# Altium PCB Wings_SMD_Breakout_v1.1.PcbDoc (part 2 of 2)
Units mm, origin at the board's own origin, x right, y up, seen from the top; angles counter-clockwise.
Board outline 50.8 x 30 mm, 2 copper layers (Top Layer, Bottom Layer), stack 1.569 mm thick; 52 components, 60 nets, 219 pads, 125 vias.
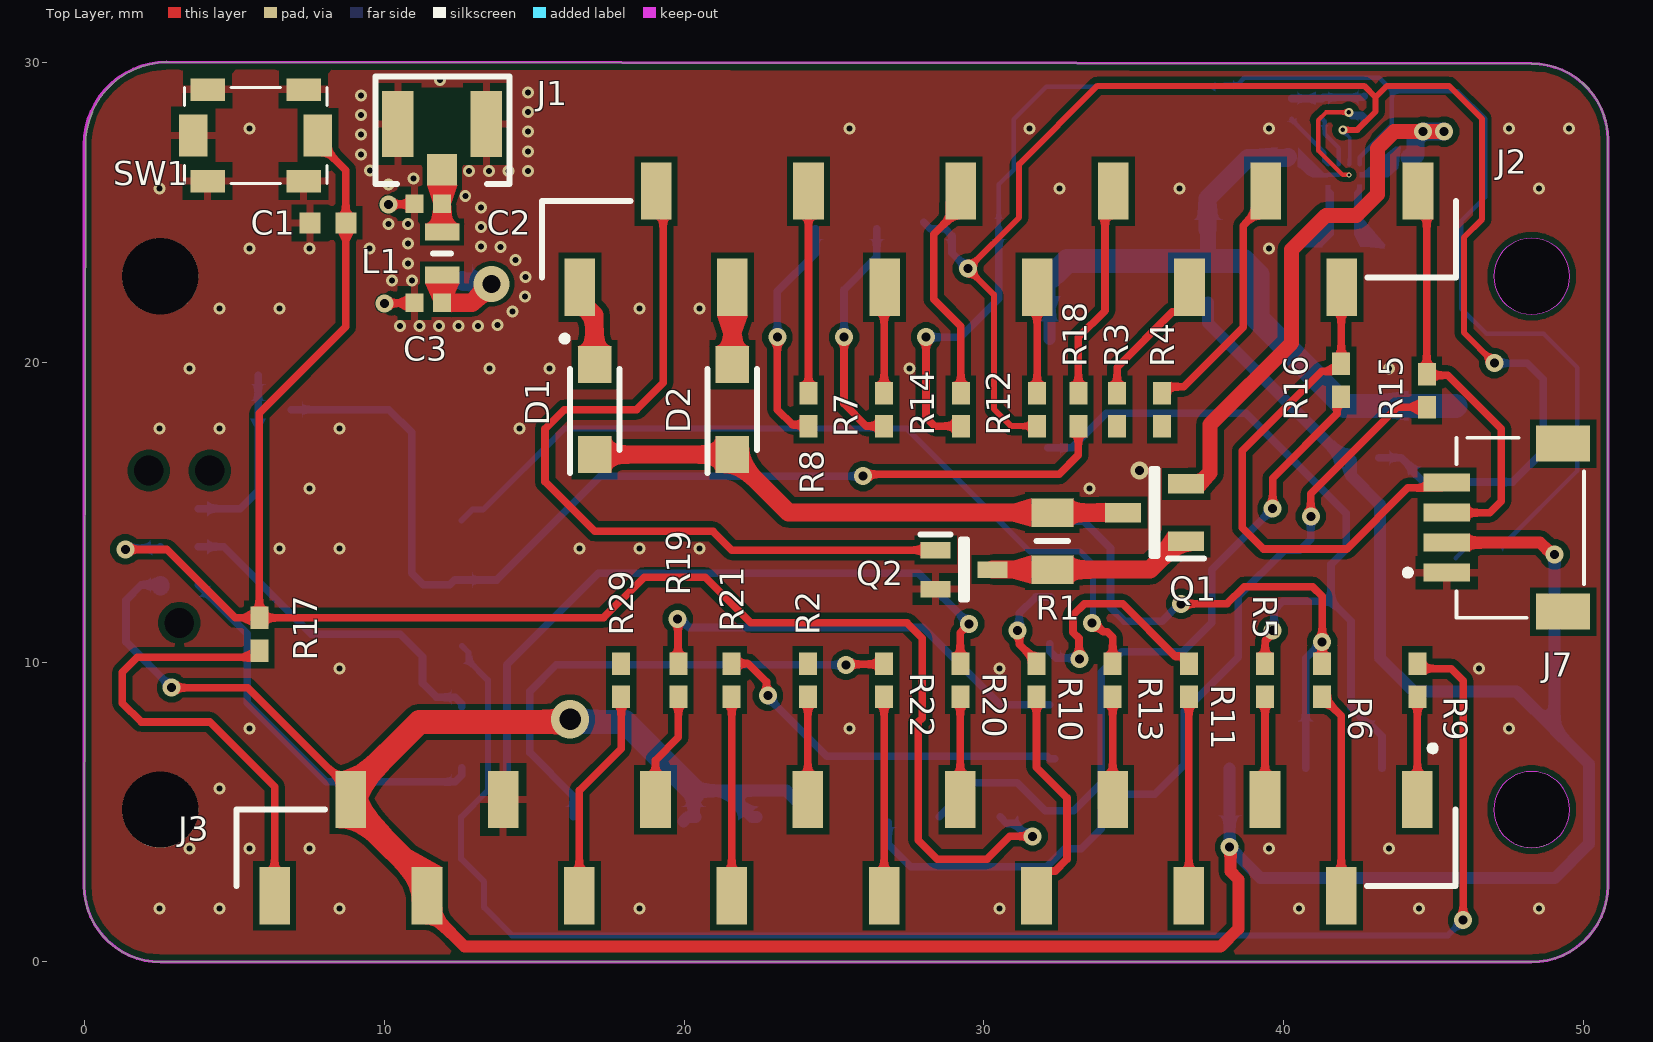
[diagram p0: Top Layer view]

## Silkscreen, mask and mechanical layers (free items; w line width, h text height) (continued)
Mechanical 1: (continued)
  text "59,00mil" at 121.841,13.144 h1.52
  text "4.3" at 138.347,13.144 h1.52
  text "2" at 62.42,10.096 h1.52
  text "Bottom Layer" at 72.832,10.096 h1.52
  text "CF-004" at 106.605,10.096 h1.52
  text "1,38mil" at 121.841,10.096 h1.52
  text "Bottom Surface Finish" at 72.832,7.048 h1.52
  text "PbSn" at 106.605,7.048 h1.52
  text "0,79mil" at 121.841,7.048 h1.52
  text "Bottom Solder" at 72.832,4 h1.52
  text "SM-001" at 106.605,4 h1.52
  text "1,00mil" at 121.841,4 h1.52
  text "4" at 138.347,4 h1.52
  text "Bottom Overlay" at 72.832,0.953 h1.52
Top 3D Body:
  lines w0.203: 36.449,22.098 ccw(c36.906,22.098) 36.906,21.641 38.024,21.641 ccw(c38.024,22.098) 38.481,22.098 38.481,24.638 ccw(c38.024,24.638) 38.024,25.095 36.906,25.095 ccw(c36.906,24.638) 36.449,24.638 36.449,22.098 ; 36.957,24.638 ccw(c37.414,24.638) 37.414,24.181 38.532,24.181 ccw(c38.532,24.638) 38.989,24.638 38.989,26.162 ccw(c38.532,26.162) 38.532,26.619 37.414,26.619 ccw(c37.414,26.162) 36.957,26.162 36.957,24.638
Mechanical 15:
  lines w0.254: 4.826,2.54 1.524,2.54 0,4.064 0,23.876 1.524,25.4 14.986,25.4 ; 45.974,2.54 49.403,2.54 50.8,3.937 50.8,24.003 49.403,25.4 45.974,25.4
Drill Drawing:
  circle w0.254: c62.119,48.027 r0.847
  lines w0.254: 61.272,36.174 61.696,36.174 61.696,35.75 62.542,35.75 62.542,36.174 62.966,36.174 62.966,37.02 62.542,37.02 62.542,37.444 61.696,37.444 61.696,37.02 61.272,37.02 61.272,36.174 ; 61.272,39.56 62.966,39.56 62.966,41.254 61.272,41.254 61.272,39.56 ; 61.272,43.794 61.696,43.794 62.119,43.37 62.542,43.794 62.966,43.794 62.542,44.217 62.966,44.64 62.542,44.64 62.119,45.064 61.696,44.64 61.272,44.64 61.696,44.217 61.272,43.794 ; 61.272,50.99 61.272,51.414 61.696,51.837 61.272,52.26 61.272,52.684 61.696,52.684 62.119,52.26 62.542,52.684 62.966,52.684 62.966,52.26 62.542,51.837 62.966,51.414 62.966,50.99 62.542,50.99 62.119,51.414 61.696,50.99 61.272,50.99 ; 61.272,54.8 62.119,55.224 62.966,54.8 62.542,55.647 62.966,56.494 62.119,56.07 61.272,56.494 61.696,55.647 61.272,54.8 ; 61.272,58.61 62.966,58.61 62.966,60.304 61.272,60.304 61.272,58.61 ; 61.272,63.267 62.119,62.42 62.966,63.267 62.119,64.114 61.272,63.267 ; 61.611,58.949 62.627,58.949 62.627,59.965 61.611,59.965 61.611,58.949
  lines w0.381: 59.753,34.608 335.114,34.608 ; 59.753,65.087 335.114,65.087 ; 73.746,30.797 73.746,68.897 ; 88.728,30.797 88.728,68.897 ; 117.929,30.797 117.929,68.897 ; 130.778,30.797 130.778,68.897 ; 149.417,30.797 149.417,68.897 ; 187.506,30.797 187.506,68.897 ; 202.488,30.797 202.488,68.897 ; 221.431,30.797 221.431,68.897 ; 244.539,30.797 244.539,68.897 ; 266.224,30.797 266.224,68.897 ; 300.098,30.797 300.098,68.897 ; 59.753,30.797 335.114,30.797 335.114,68.897 59.753,68.897 59.753,30.797
  text "Symbol" at 62.039,66.23 h1.83
  text "Count" at 74.889,66.23 h1.83
  text "Hole Size" at 89.871,66.23 h1.83
  text "Plated" at 119.072,66.23 h1.83
  text "Hole Type" at 131.921,66.23 h1.83
  text "Drill Layer Pair" at 150.56,66.23 h1.83
  text "Via/Pad" at 188.649,66.23 h1.83
  text "Pad Shape" at 203.631,66.23 h1.83
  text "Template" at 222.574,66.23 h1.83
  text "Description" at 245.682,66.23 h1.83
  text "Hole Tolerance (+)" at 267.367,66.23 h1.83
  text "Hole Tolerance (-)" at 301.241,66.23 h1.83
  text "1" at 74.889,62.42 h1.52
  text "0.100mm (3.94mil)" at 89.871,62.42 h1.52
  text "PTH" at 119.072,62.42 h1.52
  text "Round" at 131.921,62.42 h1.52
  text "Top Layer - Bottom Layer" at 150.56,62.42 h1.52
  text "Via" at 188.649,62.42 h1.52
  text "Rounded" at 203.631,62.42 h1.52
  text "v17h10" at 222.574,62.42 h1.52
  text "1" at 74.889,58.61 h1.52
  text "0.600mm (23.62mil)" at 89.871,58.61 h1.52
  text "PTH" at 119.072,58.61 h1.52
  text "Round" at 131.921,58.61 h1.52
  text "Top Layer - Bottom Layer" at 150.56,58.61 h1.52
  text "Via" at 188.649,58.61 h1.52
  text "Rounded" at 203.631,58.61 h1.52
  text "v120h60m140mx0" at 222.574,58.61 h1.52
  text "1" at 74.889,54.8 h1.52
  text "0.711mm (27.99mil)" at 89.871,54.8 h1.52
  text "PTH" at 119.072,54.8 h1.52
  text "Round" at 131.921,54.8 h1.52
  text "Top Layer - Bottom Layer" at 150.56,54.8 h1.52
  text "Via" at 188.649,54.8 h1.52
  text "Rounded" at 203.631,54.8 h1.52
  text "v127h71m147mx0" at 222.574,54.8 h1.52
  text "2" at 74.889,50.99 h1.52
  text "0.150mm (5.91mil)" at 89.871,50.99 h1.52
  text "PTH" at 119.072,50.99 h1.52
  text "Round" at 131.921,50.99 h1.52
  text "Top Layer - Bottom Layer" at 150.56,50.99 h1.52
  text "Via" at 188.649,50.99 h1.52
  text "Rounded" at 203.631,50.99 h1.52
  text "v30h15" at 222.574,50.99 h1.52
  text "3" at 74.889,47.18 h1.52
  text "0.991mm (39.02mil)" at 89.871,47.18 h1.52
  text "NPTH" at 119.072,47.18 h1.52
  text "Round" at 131.921,47.18 h1.52
  text "Top Layer - Bottom Layer" at 150.56,47.18 h1.52
  text "Pad" at 188.649,47.18 h1.52
  text "Rounded" at 203.631,47.18 h1.52
  text "c65hn99" at 222.574,47.18 h1.52
  text "4" at 74.889,43.37 h1.52
  text "2.540mm (100.00mil)" at 89.871,43.37 h1.52
  text "NPTH" at 119.072,43.37 h1.52
  text "Round" at 131.921,43.37 h1.52
  text "Top Layer - Bottom Layer" at 150.56,43.37 h1.52
  text "Pad" at 188.649,43.37 h1.52
  text "Rounded" at 203.631,43.37 h1.52
  text "c254hn254" at 222.574,43.37 h1.52
  text "29" at 74.889,39.56 h1.52
  text "0.300mm (11.81mil)" at 89.871,39.56 h1.52
  text "PTH" at 119.072,39.56 h1.52
  text "Round" at 131.921,39.56 h1.52
  text "Top Layer - Bottom Layer" at 150.56,39.56 h1.52
  text "Via" at 188.649,39.56 h1.52
  text "Rounded" at 203.631,39.56 h1.52
  text "(Mixed)" at 222.574,39.56 h1.52
  text "91" at 74.889,35.75 h1.52
  text "0.200mm (7.87mil)" at 89.871,35.75 h1.52
  text "PTH" at 119.072,35.75 h1.52
  text "Round" at 131.921,35.75 h1.52
  text "Top Layer - Bottom Layer" at 150.56,35.75 h1.52
  text "Via" at 188.649,35.75 h1.52
  text "Rounded" at 203.631,35.75 h1.52
  text "(Mixed)" at 222.574,35.75 h1.52
  text "132 Total" at 74.889,31.941 h1.52